# Altium PCB PCB.PcbDoc
Units mm, origin at the board's own origin, x right, y up, seen from the top; angles counter-clockwise.
Board outline 20 x 53 mm, 2 copper layers (Top Layer, Bottom Layer), stack 0.6 mm thick; 24 components, 8 nets, 71 pads, 123 vias.
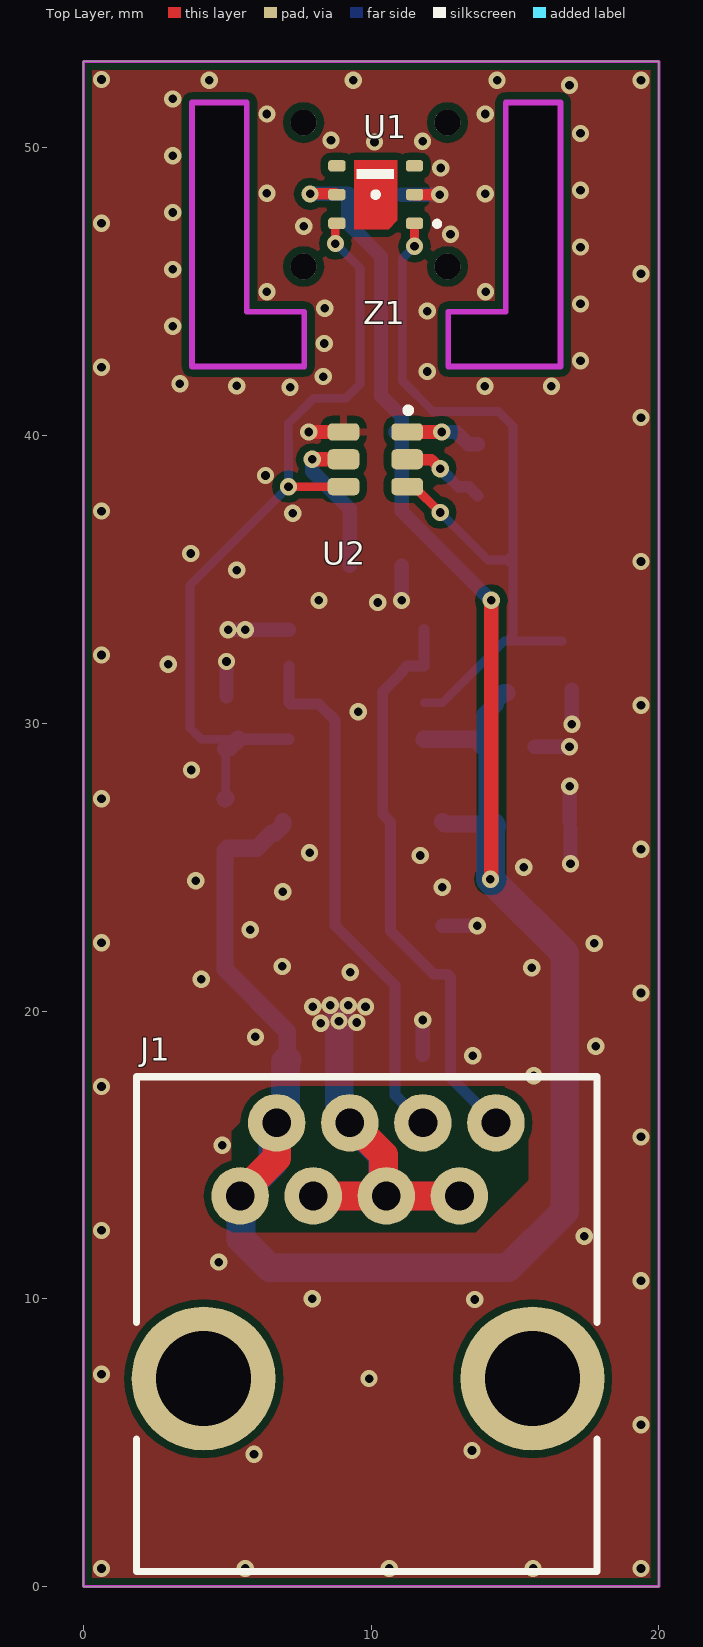
[diagram p0: Top Layer view]
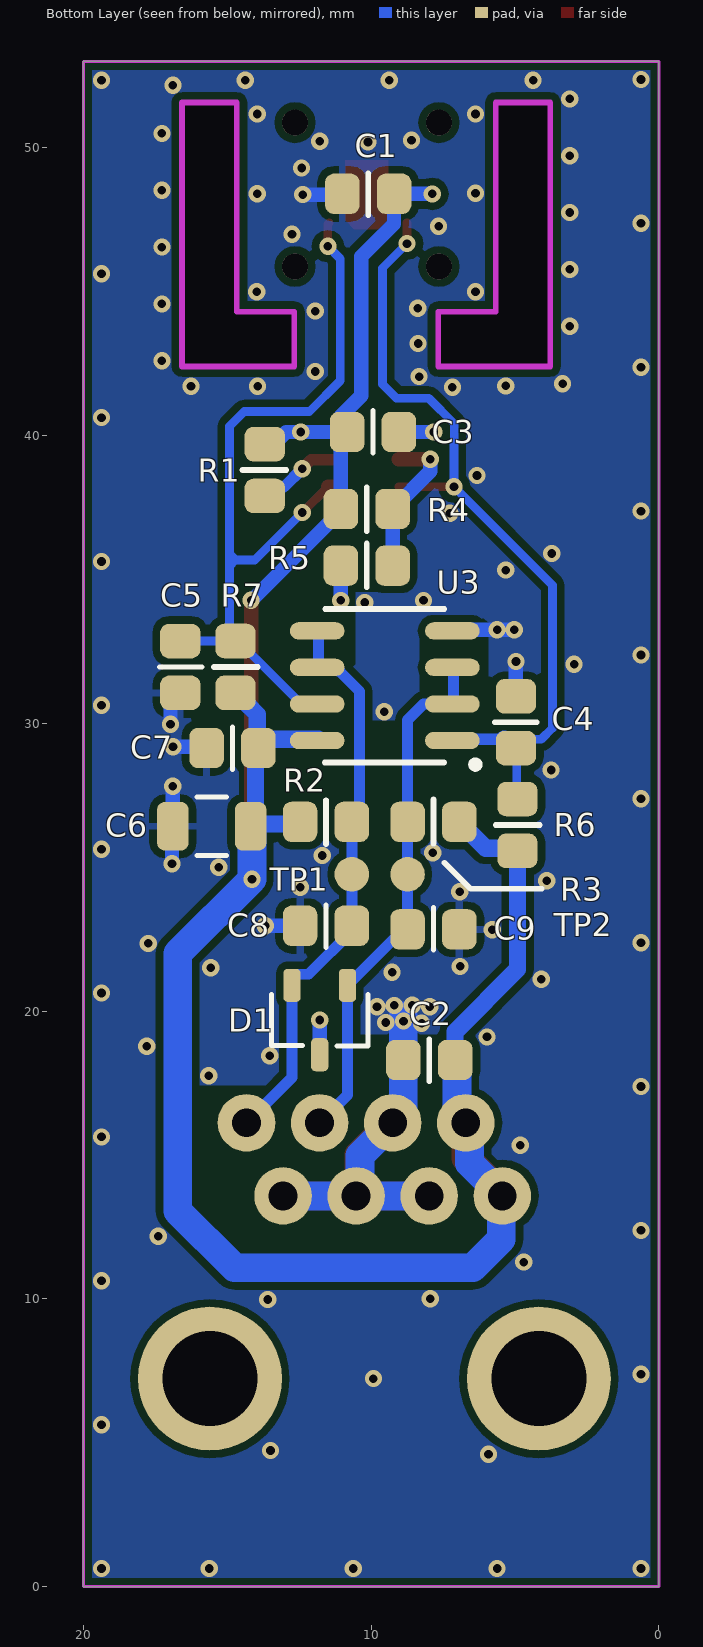
[diagram p1: Bottom Layer view, seen from below]
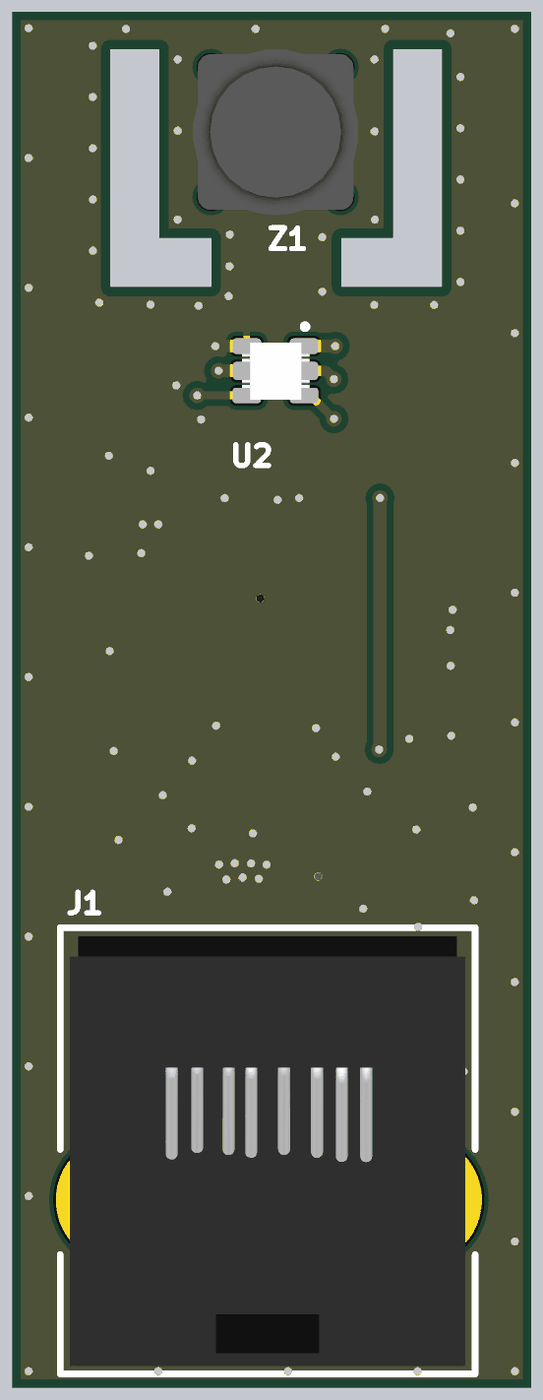
[diagram p2: 3D render of the assembled board from above, using the file's embedded part models]
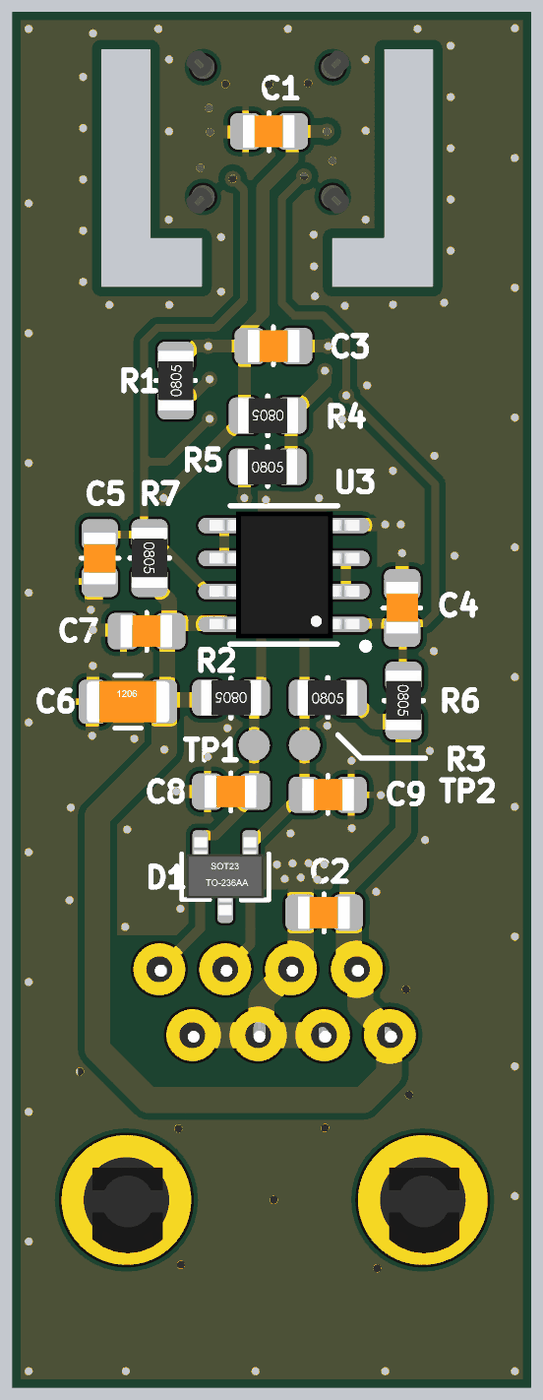
[diagram p3: 3D render of the assembled board from below, using the file's embedded part models]

## Layer stack, top to bottom
Top Solder: solder mask 0.01, Solder Resist, Dk 3.5
Top Layer: signal copper 0.035
Dielectric 1: dielectric 0.53, FR-4, Dk 4.8
Bottom Layer: signal copper 0.035
Bottom Solder: solder mask 0.01, Solder Resist, Dk 3.5

## Board outline
0,0 0,53 20,53 20,0
cut-out: 12.675,42.4 16.575,42.4 16.575,51.575 14.675,51.575 14.675,44.3 12.675,44.3
cut-out: 3.775,42.4 7.675,42.4 7.675,44.3 5.675,44.3 5.675,51.575 3.775,51.575

## Design rules (kind name [scope] priority, off if disabled: settings)
Clearance [All] p1: gap=0.254 ignorepadtopadclearanceinfootprint=FALSE except(0: Arc-Hole Track-Hole SMDPad-Hole THPad-Hole Via-Hole Fill-Hole Poly-Hole Region-Hole Text-Hole)
ComponentClearance [InComponent('Radiator1')] p1: gap=0 collisioncheckmode=3 verticalgap=0 showdistances=FALSE
DiffPairsRouting [All] p1: maxlimit=0.254 minlimit=0.254 mostfreqgap=0.254 toplayer_minwidth=0.381 toplayer_maxwidth=0.381 toplayer_prefwidth=0.381 bottomlayer_minwidth=0.381 bottomlayer_maxwidth=0.381 bottomlayer_prefwidth=0.381 maxuncoupledlength=12.7
Height [All] p1: minheight=0 maxheight=40 prefheight=12.7
HoleSize [All] p1: absolutevalues=TRUE maxlimit=5 minlimit=0.025 maxpercent=80.000 minpercent=20.000
MinimumSolderMaskSliver MinimumSolderMaskSliver_1 [All] p1: minsoldermaskwidth=0.08
MinimumSolderMaskSliver MinimumSolderMaskSliver_APDS [InComponent('U2')] p2: minsoldermaskwidth=0.08
PolygonConnect PolygonConnect_1 [HasFootprint('PN949')] p1: connectstyle=Relief reliefconductorwidth=0.5 reliefentries=4 polygonreliefangle="90 Angle" airgapwidth=0.254
PolygonConnect PolygonConnect_Via [IsVia] p2: connectstyle=Direct reliefconductorwidth=0.254 reliefentries=4 polygonreliefangle="90 Angle" airgapwidth=0.254
PolygonConnect [All] p3: connectstyle=Relief reliefconductorwidth=0.254 reliefentries=4 polygonreliefangle="90 Angle" airgapwidth=0.254
RoomDefinition boxer_sensors [InComponentClass('boxer_sensors')] p1: confinementstyle=ConfineIn formatcopy=TRUE lockcomponents=FALSE outline -3.85,-3.275 26.1,-3.275 26.1,55.1 -3.85,55.1
RoutingVias [All] p1: holewidth=0.711 width=1.27 viastyle="Through Hole" minholewidth=0.711 minwidth=1.27 maxholewidth=0.711 maxwidth=1.27
SilkToSilkClearance [All] p1: silktosilkclearance=0.1
SilkToSolderMaskClearance [IsPad] p1: minsilkscreentomaskgap=0.2 clearancetoexposedcopper=TRUE
SolderMaskExpansion [All] p1: expansion=0.102
Width [All] p1: maxlimit=10 minlimit=0.3 preferedwidth=0.5 minimp=50.000000 maximp=50.000000 favimp=50.000000
23 further rules are at their usual default settings.

## Classes and differential pairs
differential pair I2C: +I2C_P -I2C_N

## Components (designator, comment, footprint, x,y, rotation, side; value= is the part's Value field where it differs from the comment)
C1 "Capacitor" C_0805 10.104,48.401 r180 bottom value=100n
C2 "Capacitor" C_0805 7.982,18.3 r180 bottom value=100n
C3 "Capacitor" C_0805 9.937,40.125 r0 bottom value=100n
C4 "Capacitor" C_0805 4.971,30.039 r270 bottom value=DNI
C5 "Capacitor" C_0805 16.635,31.956 r90 bottom value=DNI
C6 "Capacitor" C_1206 15.542,26.423 r180 bottom value=10u
C7 "Capacitor" C_0805 14.822,29.144 r180 bottom value=100n
C8 "Capacitor" C_0805 11.575,22.963 r180 bottom value=DNI
C9 "Capacitor" C_0805 7.838,22.839 r0 bottom value=DNI
D1 "BAT54A" SOT-23 11.79,19.675 r270 bottom
J1 "KEYSTONE 949" PN949 9.89,11.67 r0 top
R1 "Resistor" R_0805 13.7,38.8 r90 bottom value=10k
R2 "Resistor" R_0805 11.575,26.575 r0 bottom value=330
R3 "Resistor" R_0805 7.837,26.575 r180 bottom value=330
R4 "Resistor" R_0805 10.155,37.45 r0 bottom value=0R
R5 "Resistor" R_0805 10.155,35.478 r180 bottom value=0R
R6 "Resistor" R_0805 4.92,26.467 r270 bottom value=1k
R7 "Resistor" R_0805 14.714,31.96 r270 bottom value=1k
TP1 "TEST PAD" PIN 10.675,24.75 r90 bottom
TP2 "TEST PAD" PIN 8.737,24.75 r90 bottom
U1 "SHT21" DFN6 10.155,48.375 r180 top
U2 "APDS-9301" CHIPLED 10.142,39.175 r180 top
U3 "PCA9600D" SO8 9.529,31.308 r0 bottom
Z1 "SF2 Filter Cap" SF2 10.15,48.375 r0 top value=SF2

## Footprints (in the part's own frame and the unit in brackets; to place one, negate y for a bottom-side part, rotate by r counter-clockwise, add the part's x,y. Pads: shape width x height; smd on the part's side, far side on the other; paste and mask are expansions set on the pad)
C_0805 [mm] "Chip Capacitor, Body 2.0x1.3mm, IPC High Density"
  rrect50% 1.2x1.4 smd: 1(-0.9,0) 2(0.9,0)
  silkscreen extent 0,-0.75 0,0.72, body extent -1.01,-0.62 0.99,0.63, height 0.8
C_1206 [mm] "Chip Capacitor, Body 3.2x1.6mm, IPC High Density"
  rrect50% 1.1x1.7 smd: 1(-1.35,0) 2(1.35,0)
  silkscreen extent -0.51,-1.02 0.51,1.02, body extent -1.6,-0.8 1.6,0.8, height 1
CHIPLED [mm]
  rrect50% 1.1x0.6 smd: 1(-1.105,-0.95) 2(1.105,-0.95) 4(1.105,0.95) 5(-1.105,0.95)
  rrect50% 1.1x0.7 smd: 3(1.105,0) 6(-1.105,0)
  silkscreen extent -1.22,-1.78 -1.07,-1.63, body extent -1.32,-1.09 1.3,1.11
DFN6 [mm] "body 3x3mm"
  rrect50% 0.6x0.4 smd: 1(-1.35,1) 2(-1.35,0) 3(-1.35,-1) 4(1.35,-1) 5(1.35,0) 6(1.35,1)
  Top Layer region: 0.75,-1.2 -0.75,-1.2 -0.75,0.9 -0.45,1.2 0.75,1.2
  silkscreen extent -2.21,-0.89 0.66,1.09, body extent -1.5,-1.5 1.5,1.5, height 1
PIN [mm] "Test Pad"
  round 1.2 smd: 1(0,0)
PN949 [mm]
  round 2 hole 1: 1(-4.445,1.905) 2(-3.175,4.445) 3(-1.905,1.905) 4(-0.635,4.445) 5(0.635,1.905) 6(1.905,4.445) 7(3.175,1.905) 8(4.445,4.445)
  round 5 hole 3.3 unplated: MH2(-5.715,-4.445) MH3(5.715,-4.445)
  silkscreen extent -8.05,-11.15 7.96,6.05, body extent -7.68,-10.85 7.58,5.71, height 16.49
R_0805 [mm] "Chip Resistor, Body 2.0x1.2mm, IPC Medium Density"
  rrect50% 1.2x1.4 smd: 1(-0.9,0) 2(0.9,0)
  silkscreen extent 0,-0.75 0,0.77, body extent -1.16,-0.67 1.14,0.68, height 0.76
SF2 [mm]
  round 0.9 hole 0.9 unplated: MH1(-2.5,-2.5) MH2(2.5,-2.5) MH3(2.5,2.5) MH4(-2.5,2.5)
  Keep-Out Layer lines w0.2: -6.375,-5.975 -2.475,-5.975 -2.475,-4.075 -4.475,-4.075 -4.475,3.2 -6.375,3.2 -6.375,-5.975 ; 2.525,-5.975 2.525,-4.075 4.525,-4.075 4.525,3.2 6.425,3.2 6.425,-5.975 2.525,-5.975
  silkscreen extent -0.06,-0.06 0.06,0.06, body extent -3.2,-3.2 3.2,3.2, height 2.03
SO8 [mm]
  oval 1.9x0.6 smd: 1(-2.35,1.905) 2(-2.35,0.635) 3(-2.35,-0.635) 4(-2.35,-1.905) 5(2.35,-1.905) 6(2.35,-0.635) 7(2.35,0.635) 8(2.35,1.905)
  silkscreen extent -3.27,-2.67 2.08,2.87, body extent -2.91,-2.45 2.87,2.45, height 1.45
SOT-23 [mm] "SOT23, 3-Leads, Body 2.9x1.3mm, Pitch 0.95mm, Lead Span 2.5mm, IPC Medium Density"
  rrect50% 1.15x0.6 smd: 1(-1.219,0.965) 2(-1.219,-0.965) 3(1.194,0)
  silkscreen extent -0.89,-1.68 0.89,1.68, body extent -1.53,-1.5 1.47,1.5, height 1.3

## Part data
D1: library part "Diode Schottky3", "dual Schottky diode common anode"
J1: library part RJ45-8, "RJ45 (keystone) Jack, Vertical PCB Mount P/N 949"
TP1 TP2: library part TEST_PAD
U1: "Humidity and Temperature Sensor IC"
U3: library part PCA9600, "Dual bidirectional I2C bus buffer"
Z1: library part SF2, "SF2 Filter Cap  Filter Cap for Humidity &  Temperature Sensors SHT2x"

## Via types
v1: diameter 0.6, hole 0.3, Top Layer to Bottom Layer, tented both sides, 123 vias

## Nets (pads, with @x,y where several pads share a name; then routed paths per layer and width w, separated by ;. In a path a pad name is that pad's centre, name@x,y a point inside that pad or via, vN(x,y) a via of type N, cw(c..) or ccw(c..) an arc to the next point about the centre after c; other vN are vias at no path point)
+3V3: C1.2 C2.2 C3.2 C6.2 C7.2 J1.1 J1.2 R1.2 R2.2 R3.2 R4.2 R6.2 R7.2 U1.5 U2.1 U3.8 | length 89.1
  Top Layer w0.4: v1(7.875,48.399) 7.877,48.4 U1.5@8.756,48.4
  Top Layer w0.5: U2.1 v1(12.449,40.125) ; v1(14.142,24.583) 14.175,24.616 v1(14.175,34.275)
  Top Layer w1: J1.1 5.445,13.626 6.715,14.896 J1.2 J1.2@6.715,16.386
  Bottom Layer w0.5: v1(7.875,48.399) 9.207,48.399 9.207,47.357 10.341,46.223 10.341,41.384 11.055,40.67 C3.2@11.055,40.125 ; C3.2 C3.2@11.055,40.125 ; R1.2 13.382,39.7 12.957,40.125 v1(12.449,40.125) C3.2@11.055,40.125 ; v1@14.075,34.357 11.055,37.377 C3.2@11.055,40.125
  Bottom Layer w0.6: R3.2 6.937,26.475 6.637,26.175 6.537,26.175 6.023,25.661 5.014,25.661 R6.2 4.92,21.45 7.085,19.285 C2.2@7.085,18.3 ; U3.8@11.837,29.445 13.621,29.445 C7.2@13.88,29.186 ; R2.2 12.551,26.499 C6.2@14.025,26.499 ; C6.2@14.025,26.45 C6.2@14.025,26.499 ; C6.2 14.116,26.499 C6.2@14.025,26.499 ; R7.2 14.614,31.06 14.314,30.76 14.314,30.66 13.959,30.304 13.959,29.265 C7.2@13.88,29.186 ; C7.2@13.88,29.186 C7.2 14.025,29.041 C6.2@14.025,26.499
  Bottom Layer w1: C2.2@7.085,18.3 7.016,18.231 7.016,16.687 6.715,16.386 J1.2 6.582,15.982 6.582,14.712 J1.1 5.478,13.542 5.478,12.072 6.475,11.075 14.75,11.075 16.725,13.05 16.725,22 v1(14.142,24.583) 14.142,26.373 C6.2
GND: C1.1 C2.1 C3.1 C4.1 C5.1 C6.1 C7.1 C8.1 C9.1 D1.3 J1.3 J1.4 J1.5 J1.7 R5.1 U1.2 U2.2 U3.4 | length 37.1
  Top Layer w0.4: U1.2 v1(12.384,48.375)
  Top Layer w0.5: v1(7.825,40.125) U2.2
  Top Layer w1: J1.3 J1.5 ; J1.4@9.255,16.386 J1.4 9.314,16.115 10.422,15.007 10.422,13.678 J1.5 ; J1.7 J1.5
  Bottom Layer w0.5: C4.1 v1(4.971,32.147) ; v1(5.025,33.255) v1(5.625,33.255) U3.4@7.137,33.255 ; v1(7.825,40.125) C3.1@9.237,40.125 ; C1.1@11.052,48.375 v1(12.384,48.375) ; v1(11.055,34.27) R5.1 ; D1.3 v1(11.79,19.69) ; C8.1 v1(13.683,22.963) ; C7.1@15.68,29.186 v1(16.889,29.186) ; C6.1@16.9,26.6 v1(16.9,27.808) ; v1(16.925,25.117) C6.1@16.925,26.325 ; v1(16.975,29.967) C5.1@16.975,31.175
  Bottom Layer w1: J1.3 J1.5 ; v1@8.885,19.825 8.885,16.485 J1.4 10.392,14.978 10.392,13.708 J1.5 ; J1.7 J1.5
  other v1: 0.625,0.625 5.625,0.625 10.625,0.625 15.625,0.625 19.375,0.625 5.925,4.598 13.5,4.725 19.375,5.625 9.925,7.225 0.625,7.375 13.6,9.975 7.95,10 19.375,10.625 4.7,11.275 17.4,12.175 0.625,12.375 4.819,15.337 19.375,15.625 0.625,17.375 15.65,17.75 13.525,18.45 17.8,18.775 5.975,19.1 8.25,19.575 9.5,19.6 8.879,19.65 7.971,20.15 9.8,20.15 9.2,20.196 8.575,20.2 19.375,20.625 4.09,21.1 9.275,21.35 15.575,21.5 6.912,21.55 17.75,22.35 0.625,22.375 5.796,22.825 6.925,24.15 12.466,24.3 3.904,24.525 15.3,25 11.707,25.407 7.858,25.5 19.375,25.625 0.625,27.375 3.75,28.375 9.55,30.4 19.375,30.625 2.95,32.05 0.625,32.375 10.225,34.2 8.182,34.27 5.325,35.325 19.375,35.625 3.725,35.9 7.275,37.3 0.625,37.375 6.325,38.61 19.375,40.625 7.179,41.681 5.325,41.725 13.95,41.712 16.262,41.712 3.35,41.8 8.336,42.05 11.95,42.225 0.625,42.375 17.275,42.6 8.371,43.2 3.1,43.8 11.95,44.325 8.383,44.425 17.275,44.575 6.375,45 13.975,45 19.375,45.625 3.1,45.775 17.275,46.55 12.755,47 7.659,47.275 0.625,47.375 3.1,47.75 13.961,48.401 6.375,48.425 17.275,48.525 12.419,49.3 3.1,49.725 10.112,50.2 11.785,50.225 8.6,50.26 17.275,50.5 6.375,51.175 13.961,51.175 3.1,51.7 16.892,52.175 4.375,52.35 9.375,52.35 14.375,52.35 19.375,52.35 0.625,52.375
I2C_N: C9.2 D1.1 J1.6 R3.1 TP2.1 U3.2 U3.3 | length 18.4
  Bottom Layer w0.381: U3.3@7.137,31.985 7.137,30.715 U3.2 8.177,30.673 8.737,30.113 R3.1 ; C9.2@8.737,23.014 8.737,22.982 D1.1 10.825,17.085 J1.6 ; C9.2@8.737,23.014 TP2.1 R3.1
I2C_P: C8.2 D1.2 J1.8 R2.1 TP1.1 U3.5 U3.6 | length 20
  Bottom Layer w0.381: U3.5@11.837,33.255 11.837,31.985 11.247,31.985 11.078,31.816 11.078,31.785 10.4,31.107 10.4,26.85 R2.1 TP1.1 C8.2 10.675,22.784 12.18,21.279 12.646,21.279 12.755,21.169 D1.2 12.755,17.695 J1.8
INT: R1.1 U2.6 | length 3
  Top Layer w0.4: U2.6 11.258,39.164 12.083,39.164 v1(12.397,38.85)
  Bottom Layer w0.4: v1(12.397,38.85) 13.034,38.214 13.386,38.214 R1.1
NetR4_1: R4.1 R5.2 U2.3 | length 5.3
  Top Layer w0.5: v1(7.95,39.175) U2.3
  Bottom Layer w0.5: v1(7.95,39.175) 7.95,38.755 R4.1 R5.2
SCL_I2C: C4.2 R6.1 U1.6 U2.4 U3.1 | length 28.9
  Top Layer w0.3: v1(7.125,38.225) U2.4 ; v1(8.756,46.671) U1.6@8.756,47.4
  Bottom Layer w0.3: R6.1@4.946,27.392 C4.2@4.946,29.113 ; C4.2@5.377,29.445 4.09,29.445 3.7,29.835 3.7,34.8 v1(7.125,38.225) 7.125,39.829 7.121,39.833 7.121,40.417 8.004,41.3 9.125,41.3 9.607,41.782 9.607,45.82 v1(8.756,46.671)
  Bottom Layer w0.4: C4.2@5.377,29.445 U3.1@7.137,29.445
  Bottom Layer w0.6: R6.1 R6.1@4.946,27.392 ; C4.2@4.946,29.113 C4.2 5.071,29.139 C4.2@5.377,29.445
SDA_I2C: C5.2 R7.1 U1.1 U2.5 U3.7 | length 28.2
  Top Layer w0.3: U2.5@11.244,38.228 U2.5 ; U1.1@11.456,47.4 11.505,47.351 v1(11.505,46.575) ; U2.5@11.497,38.225 v1(12.397,37.325)
  Top Layer w0.5: U2.5 U2.5@11.497,38.225
  Bottom Layer w0.3: v1(11.505,46.575) 11.078,46.148 11.078,41.907 12.149,40.836 14.414,40.836 14.925,40.325 14.925,35.675 ; U3.7@11.837,30.715 12.478,30.715 14.622,32.86 R7.1 ; v1(12.397,37.325) 14.047,35.675 14.925,35.675 ; C5.2 16.632,32.86 R7.1 ; R7.1 14.925,33.07 14.925,35.675
pads on no net: J1.MH2 J1.MH3 U1.3 U1.4 Z1.MH1 Z1.MH2 Z1.MH3 Z1.MH4

## Polygon pours and split planes (outlines as drawn)
GND on Bottom Layer "BOTTOM_GND" (solid, remove dead copper, pour order 8): 0,53 20,53 20,0 0,0
no net on Bottom Layer "BOTTOM_GND" (solid, pour order 2): 102.05,10.402
GND on Top Layer "TOP_GND" (solid, remove dead copper, pour order 6): 0,53 20,53 20,0 0,0
GND on Top Layer "TOP_GND" (solid, remove dead copper, pour order 4): 0,53

## Keep-outs
Keep-Out Layer:
  the board outline again, w0.1

## Other copper
Top Layer:
  pour cut-out: 6.715,17.38 14.619,17.38 15.45,16.549 15.45,14.125 13.635,12.31 5.149,12.31 5.149,15.814
Bottom Layer:
  region net SDA_I2C: 14.525,35.675 14.925,36.075 14.925,35.275
  pour cut-out: 8.885,18.3 8.885,16.485 9.42,15.95 11.825,15.95 11.825,17.955 10.591,19.189 7.65,19.189
  pour cut-out: 8.05,13.575 8.017,13.542 5.478,13.542 5.478,12.072 6.475,11.075 14.75,11.075 16.775,13.1 16.775,17.175 16.525,17.425 12.89,17.425
  pour cut-out: 5.478,13.542 6.715,14.779 6.715,16.115 14.335,16.115 14.335,13.41 13.405,12.48 7.249,12.48 6.053,13.675
  pour cut-out: 7.825,40.125 8.775,41.075 10,41.075 10,40.477 10.852,39.625 10.6,39.373 10.6,37.55 9.625,37.55 8.8,36.725
  pour cut-out: 8.327,33.128 8.327,30.599 8.128,30.4 7.813,30.715 6.125,30.715 5.923,30.917 5.923,33.489 6.088,33.654
  pour cut-out: 10.625,31.973 10.539,32.059 10.539,34.557 9.771,34.557 11.04,35.825 12.137,35.825 14.662,33.3 13.65,32.288 13.65,31.586
  pour cut-out: 11.795,16.115 10.825,17.085 10.825,20.894 8.737,22.982 8.737,26.575 8.737,30.113 10.438,30.113 10.45,30.125 10.675,29.9 10.675,22.963 12.18,21.279 12.825,21.3 12.775,17.75

## Silkscreen, mask and mechanical layers (free items; w line width, h text height)
Bottom Overlay:
  lines w0.2: 4.075,24.25 6.55,24.25 7.45,25.15